# Altium PCB Light Wedge.PcbDoc
Units mm, origin at the board's own origin, x right, y up, seen from the top; angles counter-clockwise.
Board outline 35.41 x 40 mm, 2 copper layers (Top Layer, Bottom Layer), stack 1.621 mm thick; 25 components, 22 nets, 87 pads, 61 vias.
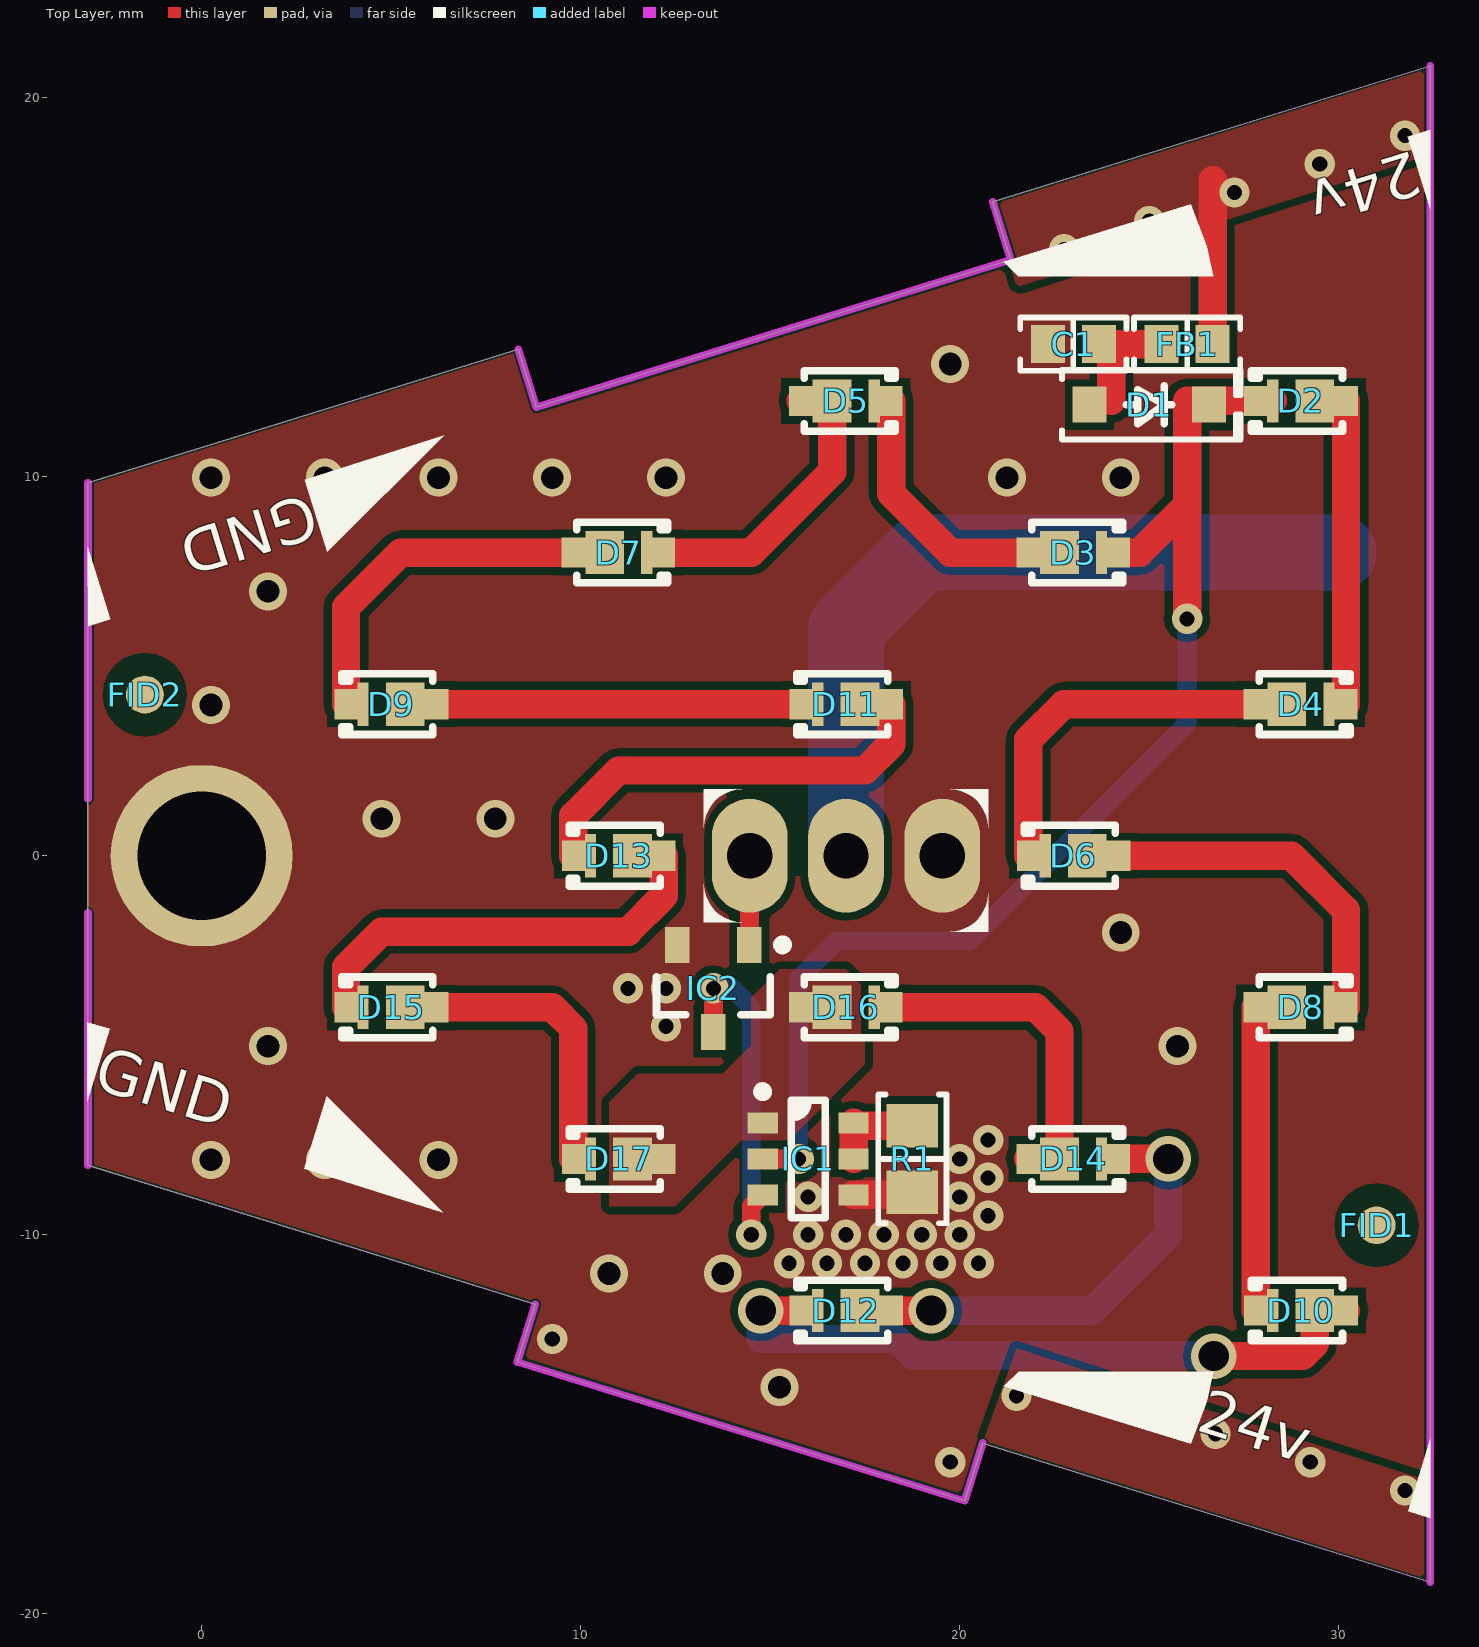
[diagram p0: Top Layer view]
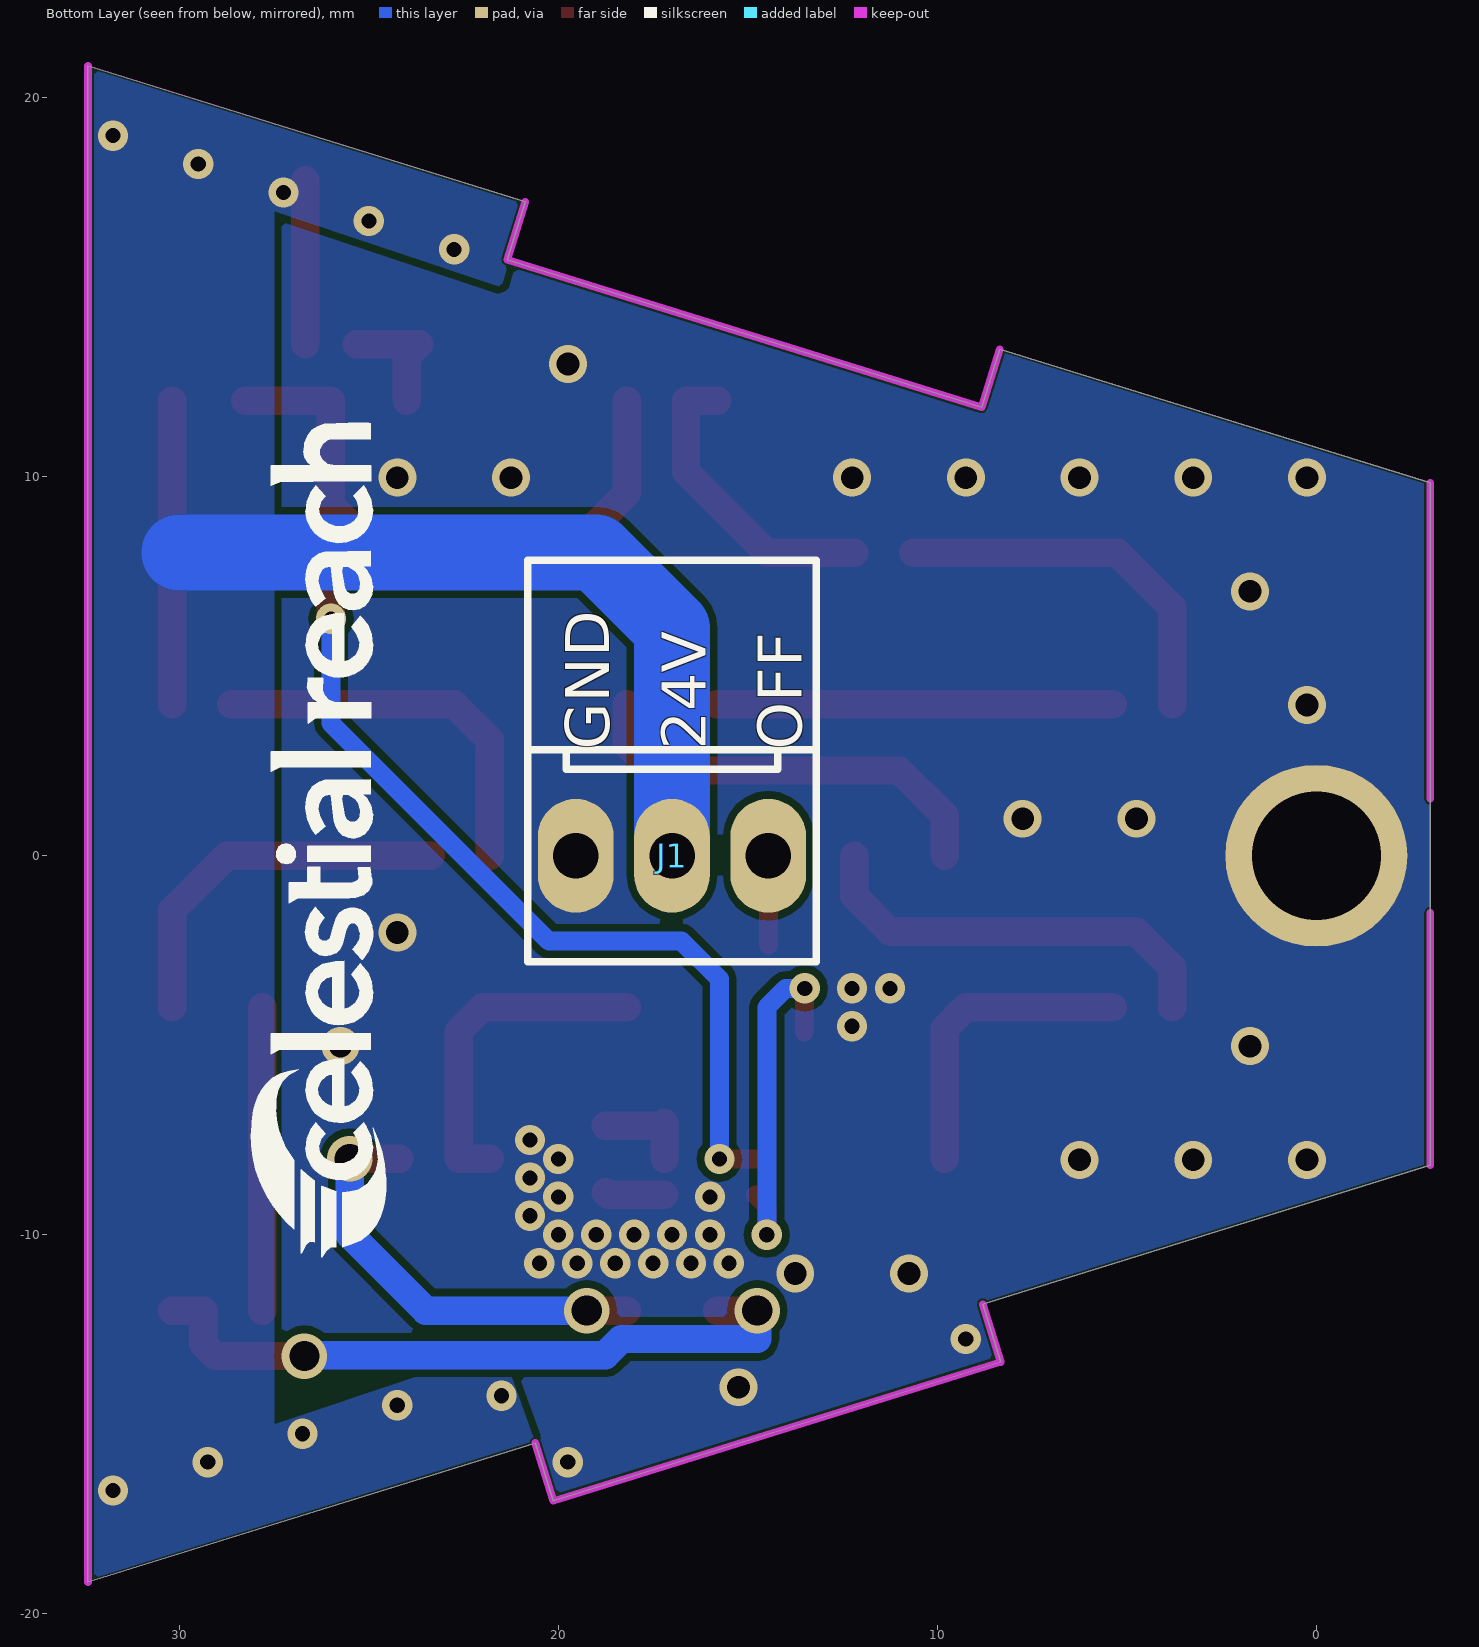
[diagram p1: Bottom Layer view, seen from below]
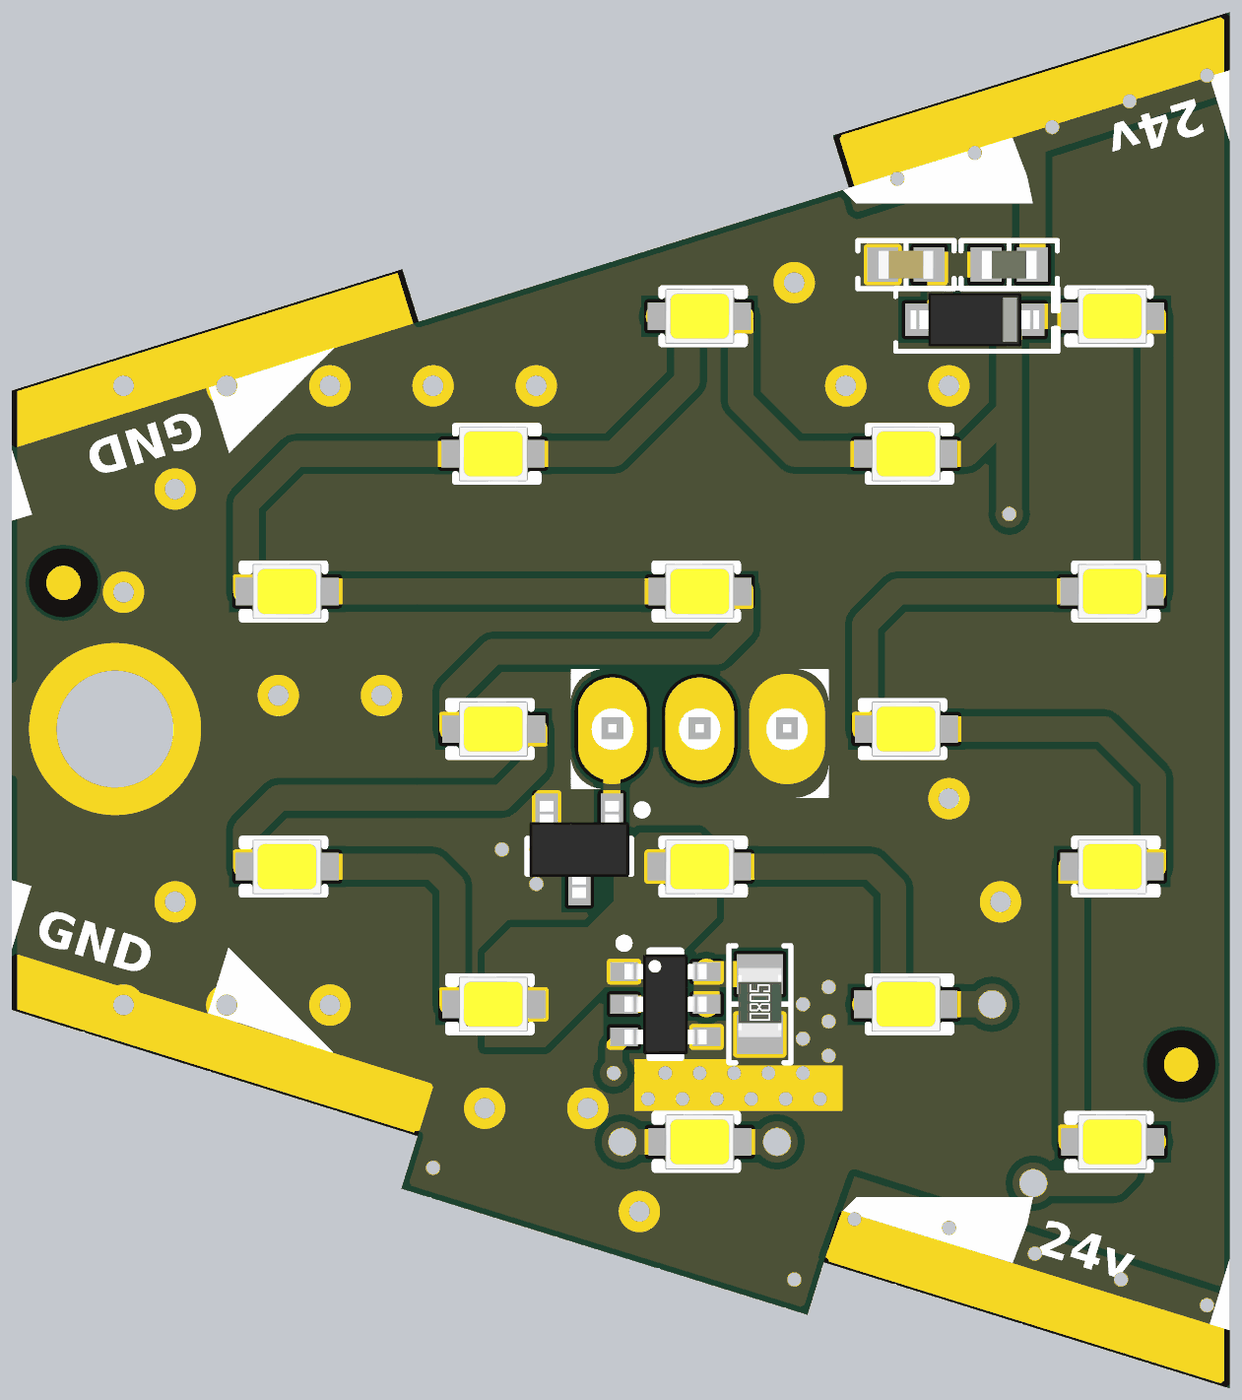
[diagram p2: 3D render of the assembled board from above, using the file's embedded part models]

## Layer stack, top to bottom
Top Solder: solder mask 0.0102, Solder Resist, Dk 3.5
Top Layer: signal copper 0.0356
Dielectric1: core 1.55, FR-4, Dk 4.8
Bottom Layer: signal copper 0.0356
Bottom Solder: solder mask 0.0102, Solder Resist, Dk 3.5

## Board outline
-3,9.838 -3,-8.162 8.803,-11.829 8.329,-13.357 20.132,-17.024 20.607,-15.496 32.41,-19.162 32.41,20.838 20.871,17.253 21.346,15.725 8.826,11.836 8.351,13.364

## Design rules (kind name [scope] priority, off if disabled: settings)
Clearance Fiducial [(HasFootprint('1MM FID'))] p1: gap=0.6
Clearance Keepout [OnLayer('Keep-Out Layer')] p2: gap=0.05
Clearance PadClearance [IsPad vs IsPad] p3: gap=0.2
Clearance [All] p4: gap=0.2
HoleSize [All] p1: absolutevalues=TRUE maxlimit=6 minlimit=0.4 maxpercent=80.000 minpercent=20.000
HoleToHoleClearance [All] p1: gap=0.2 allowstackedmicrovias=TRUE
MinimumSolderMaskSliver [All] p1: minsoldermaskwidth=0
PolygonConnect ViaConnect [IsVia] p1: connectstyle=Direct reliefconductorwidth=0.254 reliefentries=4 polygonreliefangle="90 Angle" airgapwidth=0.254
PolygonConnect [All] p2: connectstyle=Direct reliefconductorwidth=0.3 reliefentries=4 polygonreliefangle="90 Angle" airgapwidth=0.254
RoutingVias [All] p1: holewidth=0.6 width=1 viastyle="Through Hole" minholewidth=0.4 minwidth=0.8 maxholewidth=5 maxwidth=6
SilkToSilkClearance [All] p1: silktosilkclearance=0
SilkToSolderMaskClearance SilkscreenOverComponentPads [IsPad] p1: minsilkscreentomaskgap=0.05 clearancetoexposedcopper=TRUE
SolderMaskExpansion "Via Tenting" [IsVia] p1: expansion=-2
SolderMaskExpansion [All] p2: expansion=0.102
Width [All] p1: maxlimit=2 minlimit=0.2 preferedwidth=0.4
25 further rules are at their usual default settings.

## Components (designator, comment, footprint, x,y, rotation, side; value= is the part's Value field where it differs from the comment)
C1 "1uF" "CAP 0603/1608" 23,13.5 r0 top
D1 "1N5819HW-7-F" SOD-123 25,11.9 r0 top
D2 "MP-2016-1100-40-80" "LUMINUS MP-2016" 29,12 r0 top
D3 "MP-2016-1100-40-80" "LUMINUS MP-2016" 23,8 r180 top
D4 "MP-2016-1100-40-80" "LUMINUS MP-2016" 29,4 r180 top
D5 "MP-2016-1100-40-80" "LUMINUS MP-2016" 17,12 r180 top
D6 "MP-2016-1100-40-80" "LUMINUS MP-2016" 23,0 r0 top
D7 "MP-2016-1100-40-80" "LUMINUS MP-2016" 11,8 r180 top
D8 "MP-2016-1100-40-80" "LUMINUS MP-2016" 29,-4 r180 top
D9 "MP-2016-1100-40-80" "LUMINUS MP-2016" 5,4 r0 top
D10 "MP-2016-1100-40-80" "LUMINUS MP-2016" 29,-12 r0 top
D11 "MP-2016-1100-40-80" "LUMINUS MP-2016" 17,4 r0 top
D12 "MP-2016-1100-40-80" "LUMINUS MP-2016" 17,-12 r0 top
D13 "MP-2016-1100-40-80" "LUMINUS MP-2016" 11,0 r0 top
D14 "MP-2016-1100-40-80" "LUMINUS MP-2016" 23,-8 r180 top
D15 "MP-2016-1100-40-80" "LUMINUS MP-2016" 5,-4 r0 top
D16 "MP-2016-1100-40-80" "LUMINUS MP-2016" 17,-4 r180 top
D17 "MP-2016-1100-40-80" "LUMINUS MP-2016" 11,-8 r0 top
FB1 "60 Ohm @ 100MHz" "FER 0603/1608" 26,13.5 r180 top
FID1 "Fiducial" "1MM FID" 31,-9.75 r90 top
FID2 "Fiducial" "1MM FID" -1.5,4.25 r90 top
IC1 "AL5802-7" "DIODES SOT-23-6 W6" 16,-8 r0 top
IC2 "2N7002-7-F" "DIODES SOT-23-3" 13.5,-3.5 r270 top
J1 "0022272031" "MOLEX KK 0022272031" 17,0 r0 bottom
R1 "6.8" "RES 0805/2012" 18.75,-8 r90 top

## Footprints (in the part's own frame and the unit in brackets; to place one, negate y for a bottom-side part, rotate by r counter-clockwise, add the part's x,y. Pads: shape width x height; smd on the part's side, far side on the other; paste and mask are expansions set on the pad)
"1MM FID" [mm]
  round 1 smd paste-1 mask+0.5: F(0,0)
"CAP 0603/1608" [mm] "Chip Capacitor, 2-Leads, Body 1.60x0.80mm, IPC Medium Density"
  rect 0.9x1 smd: 1(-0.675,0) 2(0.675,0)
  silkscreen extent -1.4,-0.7 1.4,0.7, body extent -0.8,-0.41 0.8,0.41, height 0.82
"DIODES SOT-23-3" [mm] "SOT23, 3-Leads, Body 2.90x2.40mm, Pitch 0.95mm, IPC Medium Density"
  rect 0.95x0.65 smd: 1(-1.15,0.95) 2(1.15,0) 3(-1.15,-0.95)
  silkscreen extent -1.27,-1.5 0.7,1.95, body extent -1.41,-1.45 1.41,1.45, height 1.5
"DIODES SOT-23-6 W6" [mm] "SOT23, 6-Leads, Body 3.00x2.85mm, Pitch 0.95mm, IPC Medium Density"
  rect 0.8x0.55 smd: 1(-1.2,0.95) 2(-1.2,0) 3(-1.2,-0.95) 4(1.2,-0.95) 5(1.2,0) 6(1.2,0.95)
  silkscreen extent -1.32,-1.55 0.45,1.9, body extent -1.19,-1.45 1.2,1.45, height 1
"FER 0603/1608" [mm] "Chip Ferrite, 2-Leads, Body 1.60x0.80mm, IPC Medium Density"
  rect 0.9x1 smd: 1(-0.675,0) 2(0.675,0)
  silkscreen extent -1.4,-0.7 1.4,0.7, body extent -0.8,-0.41 0.8,0.41, height 0.82
"LUMINUS MP-2016" [mm]
  rect 0.6x0.8 smd: 1(-1.192,0)
  rect 0.3x1.14 smd: 1(-0.742,0)
  rect 1.02x1.14 smd: 2(0.367,0)
  rect 0.63x0.8 smd: 2(1.193,0)
  silkscreen extent -1.3,-0.8 1.1,0.8, body extent -1,-0.8 1,0.8, height 0.52
"MOLEX KK 0022272031" [mm]
  oval 2x3 hole 1.2: 1(-2.54,0) 2(0,0) 3(2.54,0)
  silkscreen extent -3.81,-2.79 3.81,2.79, body extent -3.81,-2.9 3.81,2.9, height 11.7
"RES 0805/2012" [mm] "Chip Resistor, 2-Leads, Body 2.00x1.25mm, IPC Medium Density"
  rect 1.15x1.35 smd: 1(-0.875,0) 2(0.875,0)
  silkscreen extent -1.7,-0.9 1.7,0.9, body extent -0.95,-0.62 1.05,0.63, height 0.6
SOD-123 [mm] "SOD, 2-Leads, Body 1.55x3.70mm, IPC Medium Density"
  rect 0.9x0.95 smd: 1(-1.575,0) 2(1.575,0)
  silkscreen extent -2.3,-0.92 2.41,0.92, body extent -1.86,-0.78 1.86,0.77, height 1.35

## Part data
C1: library part UMK107AB7105KA-T, "CAP CER 1UF 50V X7R 0603"
D1: "DIODE SCHOTTKY 40V 1A SOD123"
D2 D3 D4 D5 D6 D7 D8 D9 D10 D11 D12 D13 D14 D15 D16 D17: "LED XNOVA NEUTRAL WHT 4000K 0806"
FB1: library part CIC10J600NC, "FERRITE CHIP 60 OHM 2000MA 0603"
IC1: "IC LED DRVR LIN DIM 120MA SOT26"
IC2: "MOSFET N-CH 60V 115MA SOT23-3"
J1: "CONN HEADER 3POS .100 VERT TIN"
R1: library part ERJ-6RQF6R8V, "RES SMD 6.8 OHM 1% 1/8W 0805"

## Free pads (board coordinates)
  round 4.8 hole 3.4: 1(0,0)

## Via types
v1: diameter 0.8, hole 0.4, Top Layer to Bottom Layer, tented top, 36 vias
v2: diameter 1, hole 0.6, Top Layer to Bottom Layer, 21 vias
v3: diameter 1.2, hole 0.8, Top Layer to Bottom Layer, tented top, 4 vias

## Nets (pads, with @x,y where several pads share a name; then routed paths per layer and width w, separated by ;. In a path a pad name is that pad's centre, name@x,y a point inside that pad or via, vN(x,y) a via of type N, cw(c..) or ccw(c..) an arc to the next point about the centre after c; other vN are vias at no path point)
24V: D1.2 D2.1 D3.1 IC1.2 | length 31.8
  Top Layer w0.5: IC1.2 v1(15.75,-8)
  Top Layer w0.75: D3.1@24.192,8 24.75,8 26,9.25 ; v1(26,6.25) 26,9.25 ; D2.1@28.258,12 27.808,12 26,12 26,9.25
  Bottom Layer w0.5: v1(15.75,-8) 15.75,-3.25 16.75,-2.25 20.25,-2.25 26,3.5 v1(26,6.25)
EN: IC2.1 J1.1 | length 2.4
  Top Layer w0.5: IC2.1 14.45,-0.01 J1.1
FB: IC1.5 IC1.6 R1.2 | length 2.5
  Top Layer w0.75: IC1.5 IC1.6 17.275,-7.125 R1.2
GND: C1.1 IC1.4 IC2.3 J1.3 pad.1 R1.1 | length 1.6
  Top Layer w0.75: IC1.4 18.675,-8.95 R1.1
  other v1: 19.75,-16 9.25,-12.75 15.5,-10.75 16.5,-10.75 17.5,-10.75 18.5,-10.75 19.5,-10.75 20.5,-10.75 16,-10 17,-10 18,-10 19,-10 20,-10 20.75,-9.5 16,-9 20,-9 20.75,-8.5 20,-8 20.75,-7.5 12.25,-4.5 11.25,-3.5 12.25,-3.5
  other v2: 15.248,-14.023 10.748,-11.023 13.748,-11.023 0.248,-8.023 3.248,-8.023 6.248,-8.023 1.748,-5.023 25.748,-5.023 24.248,-2.023 4.748,0.977 7.748,0.977 0.248,3.977 1.748,6.977 0.248,9.977 3.248,9.977 6.248,9.977 9.248,9.977 12.248,9.977 21.248,9.977 24.248,9.977 19.748,12.977
NetC1_2: C1.2 D1.1 FB1.2 | length 3.3
  Top Layer w0.75: 24,12 24,13.175 C1.2 FB1.2
NetD2_2: D2.2 D4.1 | length 8
  Top Layer w0.75: D4.1@30.192,4 D2.2@30.192,12
NetD3_2: D3.2 D5.1 | length 6.7
  Top Layer w0.75: D5.1@18.192,12 18.192,9.557 19.75,8 D3.2@21.807,8
NetD4_2: D4.2 D6.1 | length 10.3
  Top Layer w0.75: D6.1@21.808,0 21.808,3.057 22.75,4 27.807,4 D4.2@28.633,4
NetD5_2: D5.2 D7.1 | length 8
  Top Layer w0.75: D7.1@12.193,8 14.5,8 16.632,10.132 16.632,12 D5.2@15.807,12
NetD6_2: D6.2 D8.1 | length 10
  Top Layer w0.75: D6.2@23.367,0 28.75,0 30.192,-1.442 D8.1@30.192,-4
NetD7_2: D7.2 D9.1 | length 10
  Top Layer w0.75: D9.1@3.808,4 3.808,6.558 5.25,8 9.807,8 D7.2@10.633,8
NetD8_2: D8.2 D10.1 | length 8
  Top Layer w0.75: D10.1@27.808,-12 D8.2@27.808,-4
NetD9_2: D9.2 D11.1 | length 10.4
  Top Layer w0.75: D9.2@5.368,4 6.193,4 D11.1@15.807,4
NetD10_2: D10.2 D12.1 | length 18.5
  Top Layer w0.75: v3(14.75,-12) D12.1@15.807,-12 ; v3(26.7,-13.2) 29.05,-13.2 29.368,-12.882 29.368,-12 D10.2@30.193,-12
  Bottom Layer w0.75: v3(14.75,-12) 14.75,-12.75 18.338,-12.75 18.763,-13.175 26.675,-13.175 v3(26.7,-13.2)
NetD11_2: D11.2 D13.1 | length 11.3
  Top Layer w0.75: D13.1@9.808,0 9.808,1.058 11,2.25 17.5,2.25 18.193,2.943 D11.2@18.193,4
NetD12_2: D12.2 D14.1 | length 11.4
  Top Layer w0.75: D12.2@18.193,-12 v3(19.25,-12) ; D14.1@24.192,-8 v3(25.5,-8)
  Bottom Layer w0.75: v3(19.25,-12) 23.5,-12 25.5,-10 v3(25.5,-8)
NetD13_2: D13.2 D15.1 | length 11.3
  Top Layer w0.75: D15.1@3.808,-4 3.808,-2.942 4.75,-2 11.25,-2 12.193,-1.057 D13.2@12.193,0
NetD14_2: D14.2 D16.1 | length 8.9
  Top Layer w0.75: D16.1@18.192,-4 22,-4 22.632,-4.633 22.632,-8 D14.2@21.807,-8
NetD15_2: D15.2 D17.1 | length 8.1
  Top Layer w0.75: D15.2@5.368,-4 6.193,-4 9.25,-4 9.808,-4.558 D17.1@9.808,-8
NetIC1_3: IC1.3 IC2.2 | length 9.5
  Top Layer w0.5: IC2.2 v1(13.5,-3.5) ; v1(14.5,-10) 14.5,-9.25 IC1.3
  Bottom Layer w0.5: v1(13.5,-3.5) 14,-3.5 14.5,-4 v1(14.5,-10)
OUT: D16.2 D17.2 IC1.1
VCC: FB1.1 J1.2 | length 24.2
  Top Layer w0.75: FB1.1 26.675,17.825
  Bottom Layer w2: J1.2 17,6 19,8 30,8
  other v1: 31.75,-16.75 29.25,-16 26.75,-15.25 24.25,-14.5 21.5,-14.25 22.75,16 25,16.75 27.25,17.5 29.5,18.25 31.75,19
pads on no net: FID1.F FID2.F

## Polygon pours and split planes (outlines as drawn)
GND on Top Layer "Top Layer-GND" (solid, remove dead copper, pour order 16): -3,9.838 32.41,20.838 32.41,-19.162 20.607,-15.496 20.132,-17.024 8.329,-13.357 8.803,-11.829 -3,-8.162
OUT on Top Layer "Top Layer-OUT" (solid, pour order 11): 17,-3 17.5,-3.5 17.5,-5.5 15.75,-7.25 15.5,-7.5 15.25,-7.5 14.25,-7.5 12.5,-9.25 10.75,-9.25 10.75,-6.5 11.5,-5.75 13.75,-5.75 14.5,-5 14.5,-3.75 15.25,-3
VCC on Top Layer "Top Layer-VCC" (solid, pour order 12): 20.871,17.253 21.5,15 32.41,18.5 32.41,20.838
VCC on Top Layer "Top Layer-VCC" (solid, pour order 13): 20.607,-15.496 21.5,-13 32.41,-16.5 32.41,-19.162
no net on Top Solder "Top Layer-VCC" (solid, pour order 29): 20.607,-15.496 21.075,-13.975 32.41,-17.475 32.41,-19.162
no net on Top Solder "Top Layer-VCC" (solid, pour order 28): 8.803,-11.829 9.275,-10.325 -3,-6.5 -3,-8.162
no net on Top Solder "Top Layer-VCC" (solid, pour order 27): 8.351,13.364 8.826,11.836 -3,8.15 -3,9.838
no net on Top Solder "Top Layer-VCC" (solid, pour order 26): 20.871,17.253 21.346,15.725 32.41,19.15 32.41,20.838
GND on Bottom Layer "Bottom Layer-GND" (solid, remove dead copper, pour order 15): -3,9.838 32.41,20.838 32.41,-19.162 20.607,-15.496 20.132,-17.024 8.329,-13.357 8.803,-11.829 -3,-8.162
VCC on Bottom Layer "Bottom Layer-VCC" (solid, pour order 14): 20.607,-15.496 21.5,-13 27.5,-15 27.5,17 21.5,15 20.871,17.253 32.41,20.838 32.41,-19.162

## Keep-outs
Keep-Out Layer:
  lines w0.01: -3,-8.162 8.803,-11.829 ; -3,9.838 8.351,13.364 ; 20.607,-15.496 32.41,-19.162 ; 20.871,17.253 32.41,20.838
  lines w0.2: -3,-8.162 -3,-1.5 ; -3,1.5 -3,9.838 ; 8.351,13.364 8.826,11.836 21.346,15.725 20.871,17.253 ; 8.803,-11.829 8.329,-13.357 20.132,-17.024 20.607,-15.496 ; 32.41,-19.162 32.41,20.838

## Silkscreen, mask and mechanical layers (free items; w line width, h text height)
Top Overlay:
  region: 32.41,-15.4 32.41,-17.475 31.83,-17.3
  region: 32.418,17.065 32.41,19.15 31.825,18.975
  region: -3.005,8.146 -2.997,6.061 -2.412,6.236
  region: -3.025,-6.475 -3.017,-4.39 -2.432,-4.565
  region: 3.298,-6.344 6.375,-9.421 6.375,-9.425 2.705,-8.254
  region: 3.318,8.015 6.395,11.092 6.395,11.096 2.725,9.925
  region: 26.1,-15.521 26.525,-14.4 26.693,-13.611 21.552,-13.611 21.161,-14.002
  region: 26.095,17.196 26.52,16.075 26.688,15.286 21.547,15.286 21.156,15.677
  region: 13.25,-0.75 ccw(c14.25,-0.75) 14.25,-1.75 13.25,-1.75
  region: 14.25,1.75 ccw(c14.25,0.75) 13.25,0.75 13.25,1.75
  region: 20.75,-1 cw(c19.75,-1) 19.75,-2 20.75,-2
  region: 19.75,1.75 cw(c19.75,0.75) 20.75,0.75 20.75,1.75
  text "24v" at 31.825,18.975 h2 r197.25
  text "GND" at 2.725,9.925 h2 r197.25
  text "GND" at -3.025,-6.475 h2 r342.75
  text "24v" at 26.1,-15.521 h2 r342.75
Bottom Overlay:
  drawing of 537 lines, arcs and shapes, not listed
  text "OFF" at 13.19,2.794 h2 r270
  text "24V" at 15.73,2.794 h2 r270
  text "GND" at 18.27,2.794 h2 r270
Top Solder:
  rectangle: 15.1,-10 17.8,-9.6
  rectangle: 15.1,-11.1 21.15,-9.775
Bottom Solder:
  rectangle: 16.4,-8.6 21.2,-6.4
  rectangle: 15.1,-11.4 21.2,-8.6
Outlines:
  the board outline again, w0.2
Milling:
  lines w0.5: 7.75,-11.75 8.45,-11.975 ; 8.05,-13.425 8.5,-12 ; 8.44,13.871 8.997,12.139 10.422,12.589 ; 19.31,15.34 21.042,15.896 20.592,17.321 ; 20.279,-17.351 20.778,-15.799 22.203,-16.249
  lines w2: -3.577,-9.026 7.525,-12.475 ; -3.507,10.723 32.303,21.864 ; 6.5,-13.5 6.69,-13.861 21.262,-18.388 22,-18 ; 9.496,13.088 20.016,16.361 ; 21.278,-16.762 32.276,-20.179